# Altium PCB E001-V2.1.PcbDoc (part 1 of 2)
Units mm, origin at the board's own origin, x right, y up, seen from the top; angles counter-clockwise.
Board outline 10.25 x 28.76 mm, 4 copper layers (Top Layer, SIG, GND, Bottom Layer); 47 components, 39 nets, 149 pads, 107 vias.
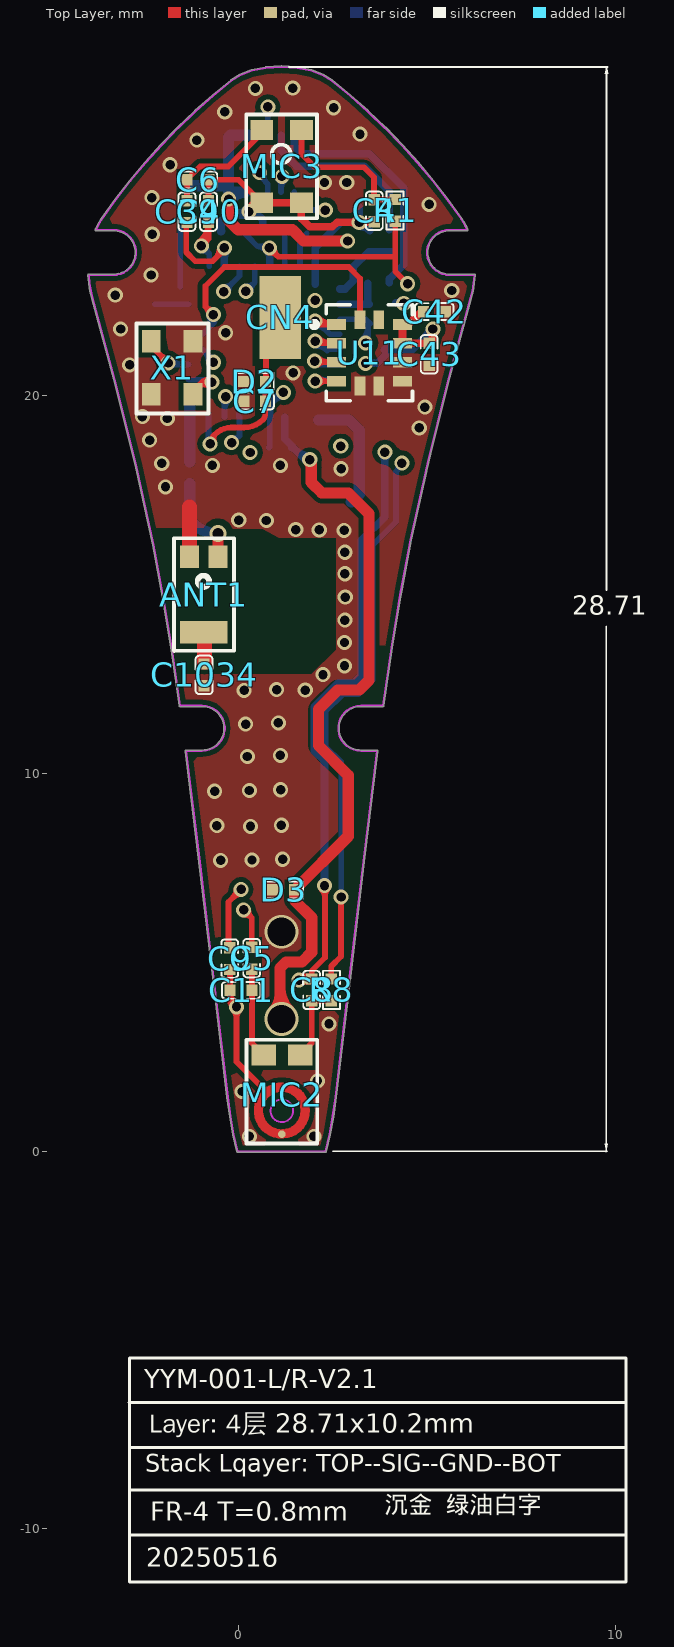
[diagram p0: Top Layer view]
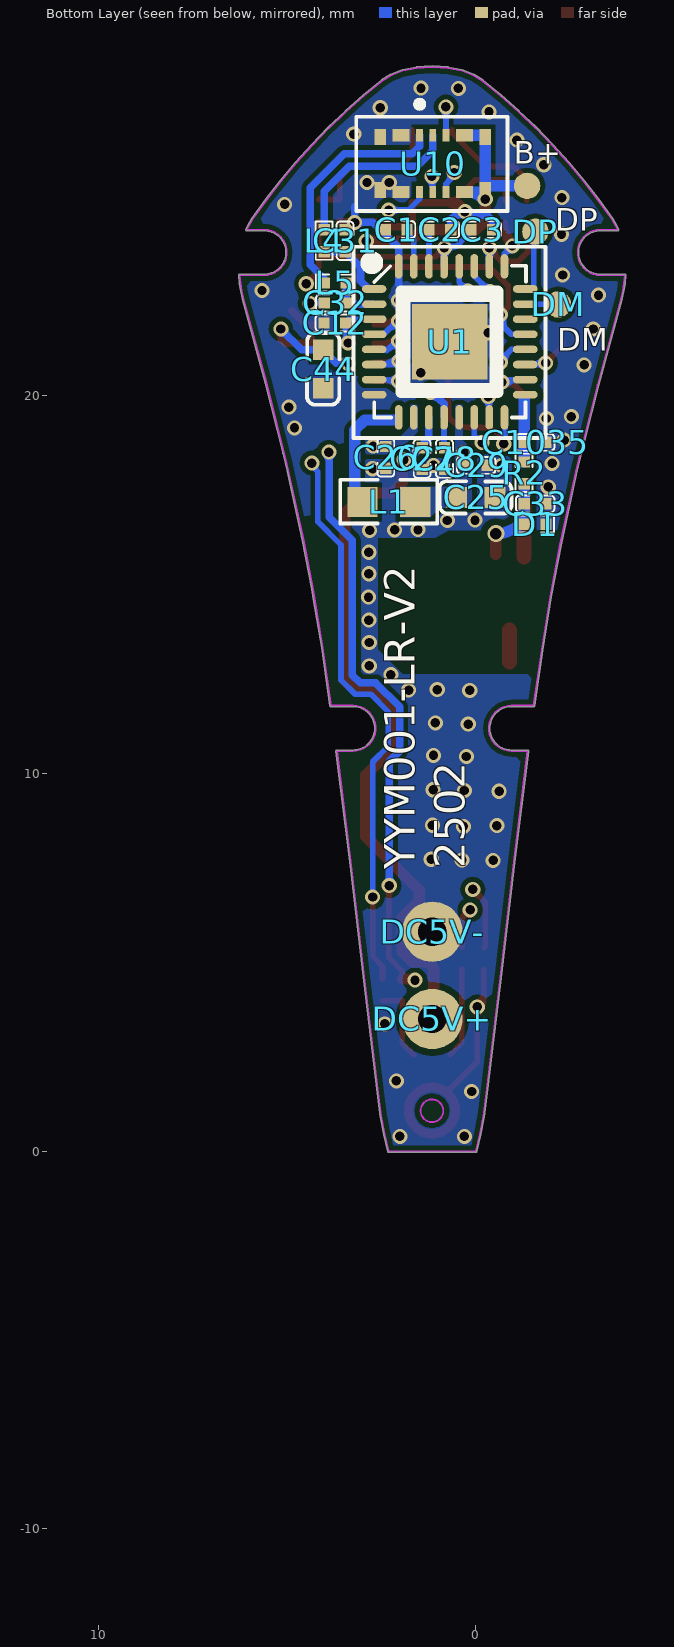
[diagram p1: Bottom Layer view, seen from below]
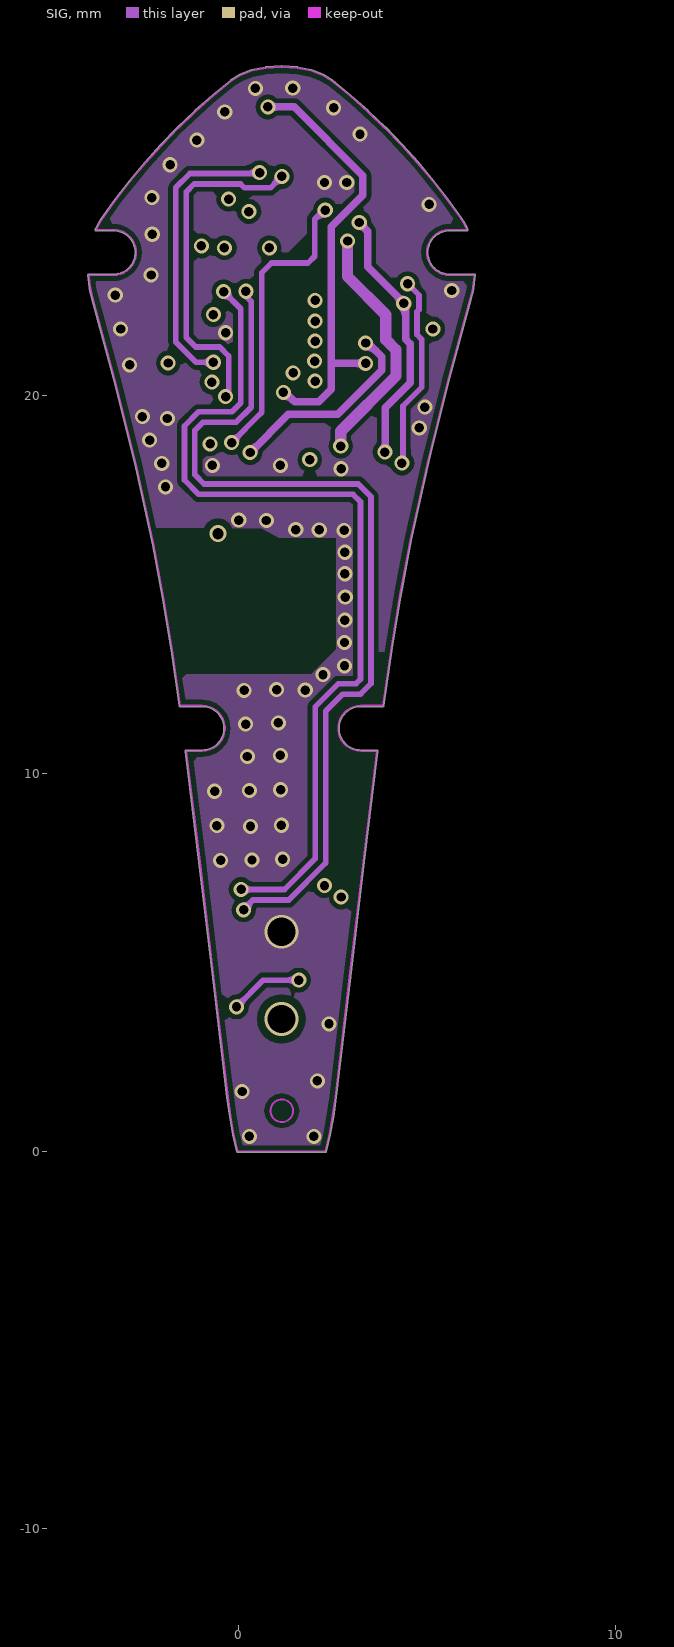
[diagram p2: SIG]
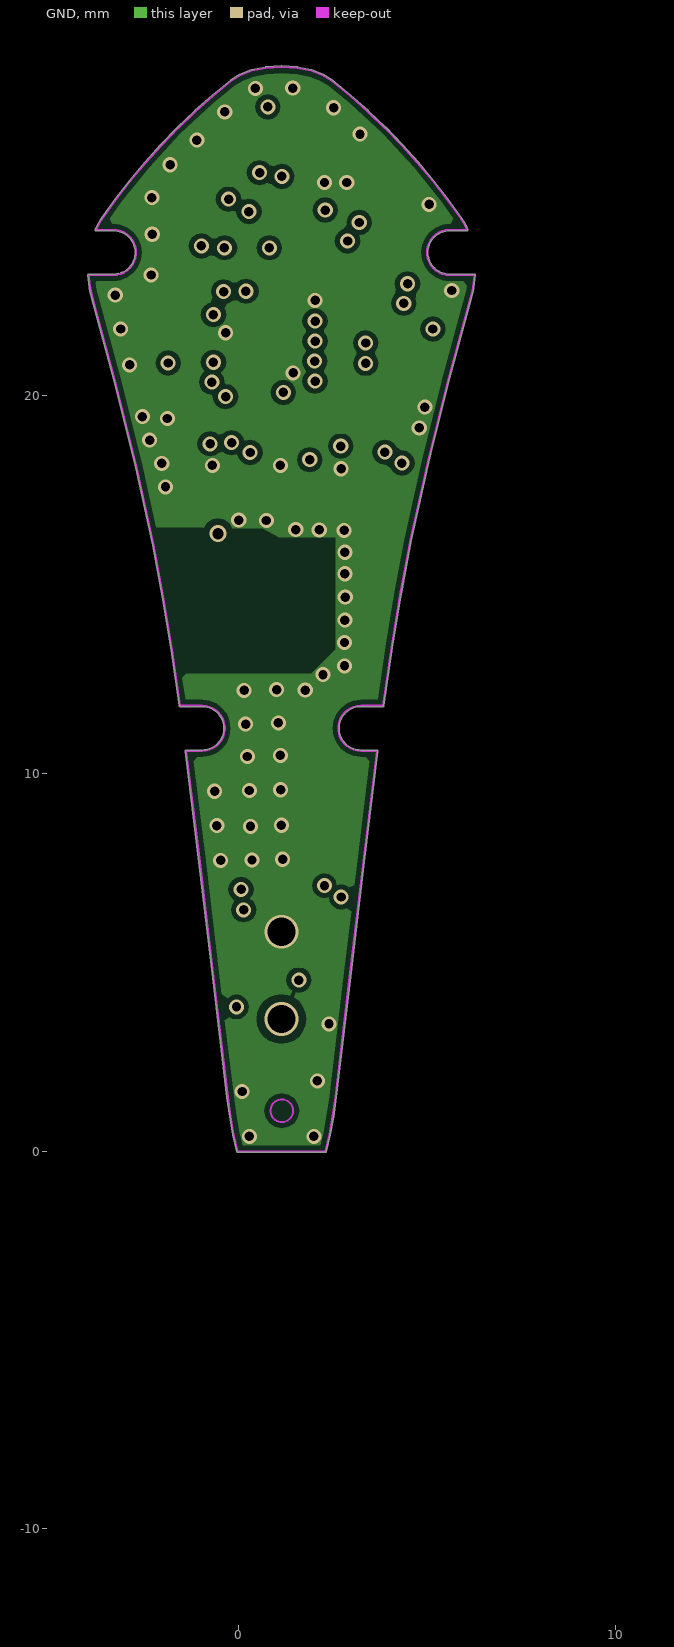
[diagram p3: GND]
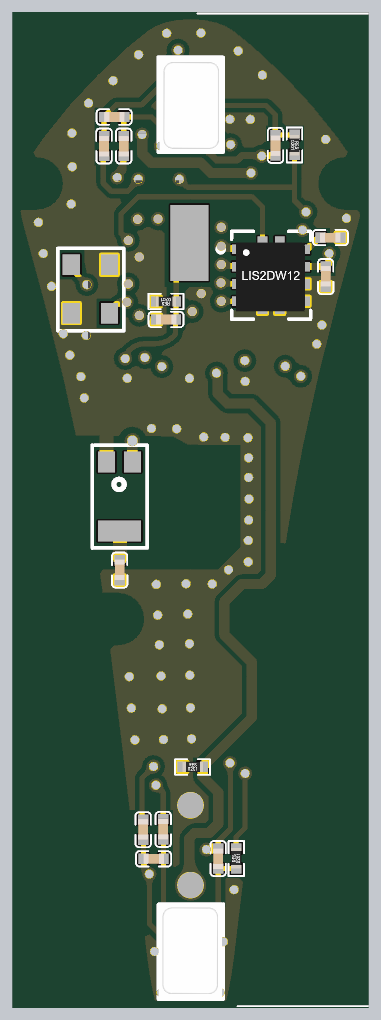
[diagram p5: 3D render of the assembled board from above, using the file's embedded part models]
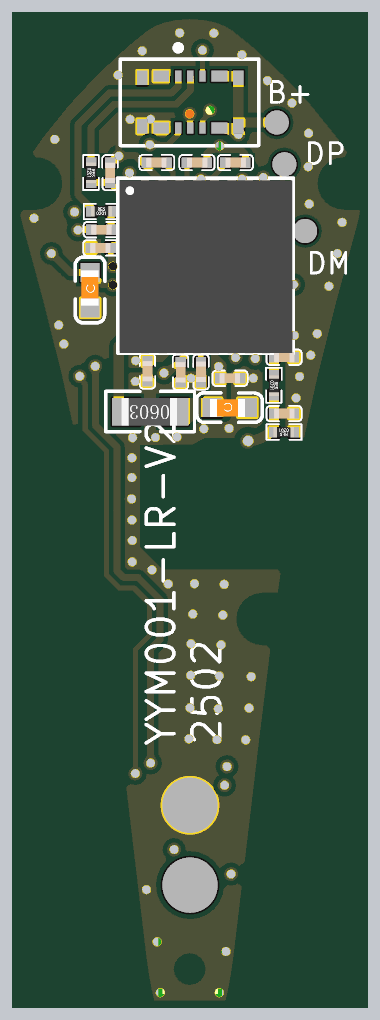
[diagram p6: 3D render of the assembled board from below, using the file's embedded part models]

## Layer stack, top to bottom
Top Layer: signal copper 0.0356
Dielectric: core 0.32, FR-4, Dk 4.8
SIG: signal copper 0.0356
Dielectric: prepreg 0.32, FR-4, Dk 4.8
GND: signal copper 0.0356
Dielectric: core 0.32, FR-4, Dk 4.8
Bottom Layer: signal copper 0.0356

## Board outline
-2.004,14.685 -2.259,16.044 -2.707,18.103 -3.252,20.283 -3.253,20.284 -3.252,20.283 -3.875,22.581 cw(c-3.851,22.587) -3.876,22.582 -3.921,22.771 cw(c-3.896,22.777) -3.921,22.772 cw(c-3.896,22.777) -3.921,22.773 ccw(c-3.896,22.777) -3.921,22.771 -3.921,22.773 cw(c-3.896,22.777) -3.921,22.773 -3.954,22.976 cw(c-3.929,22.981) -3.954,22.977 cw(c-3.929,22.981) -3.954,22.978 -3.974,23.195 cw(c-3.949,23.197) -3.949,23.223 -3.297,23.223 ccw(c-3.297,23.797) -2.723,23.797 ccw(c-3.297,23.797) -3.297,24.372 ccw(c-3.297,23.797) -3.297,24.372 ccw(c-3.297,24.397) -3.297,24.372 -3.758,24.372 cw(c-3.758,24.397) -3.781,24.408 -3.733,24.51 cw(c-3.71,24.5) -3.732,24.512 -3.681,24.606 cw(c-3.658,24.594) -3.681,24.607 cw(c-3.658,24.594) -3.68,24.608 -3.625,24.695 cw(c-3.603,24.681) -3.624,24.695 cw(c10.324,15.084) -0.189,28.366 cw(c-0.173,28.346) -0.187,28.367 0.052,28.514 cw(c0.066,28.493) 0.057,28.517 0.36,28.632 cw(c0.369,28.608) 0.36,28.632 cw(c0.369,28.608) 0.364,28.633 0.727,28.708 0.728,28.708 cw(c0.733,28.683) 0.731,28.709 1.151,28.737 cw(c1.153,28.711) 1.154,28.737 1.574,28.709 cw(c1.572,28.683) 1.578,28.708 1.941,28.633 cw(c1.936,28.608) 1.945,28.632 cw(c1.936,28.608) 1.945,28.632 2.248,28.517 cw(c2.24,28.493) 2.249,28.516 2.249,28.517 cw(c2.24,28.493) 2.253,28.514 2.492,28.367 cw(c2.479,28.346) 2.494,28.366 cw(c-8.019,15.084) 5.929,24.695 cw(c5.908,24.681) 5.93,24.695 5.985,24.608 cw(c5.963,24.594) 5.986,24.607 6.037,24.512 cw(c6.015,24.5) 6.038,24.511 6.038,24.51 6.086,24.408 cw(c6.063,24.397) 6.086,24.408 cw(c6.063,24.397) 6.088,24.397 cw(c6.063,24.397) 6.063,24.372 5.603,24.372 cw(c5.603,24.397) 5.602,24.372 cw(c5.603,23.797) 5.603,24.372 5.602,24.372 ccw(c5.603,23.797) 5.603,23.223 6.254,23.223 cw(c6.254,23.197) 6.28,23.197 cw(c6.254,23.197) 6.28,23.195 6.26,22.978 cw(c6.234,22.981) 6.259,22.977 6.226,22.773 cw(c6.201,22.777) 6.226,22.771 6.181,22.582 cw(c6.156,22.587) 6.181,22.581 5.571,20.334 5.104,18.477 cw(c5.08,18.47) 5.105,18.47 cw(c5.08,18.47) 5.105,18.464 4.995,18.014 cw(c4.97,18.02) 4.993,18.009 4.59,16.177 4.345,14.884 cw(c4.32,14.88) 4.345,14.88 cw(c4.32,14.88) 4.345,14.876 4.298,14.614 4.085,13.326 4.085,13.327 4.085,13.326 3.862,11.794 cw(c3.837,11.797) 3.862,11.793 3.862,11.794 cw(c3.837,11.797) 3.837,11.772 3.253,11.772 ccw(c3.253,11.197) 3.252,10.623 ccw(c3.253,11.197) 3.253,10.623 3.678,10.623 cw(c3.678,10.597) 3.703,10.597 cw(c3.678,10.597) 3.703,10.594 3.342,7.671 2.98,4.615 2.6,1.425 cw(c2.574,1.428) 2.6,1.424 2.529,0.919 cw(c2.504,0.923) 2.529,0.918 2.442,0.441 cw(c2.417,0.445) 2.442,0.439 2.337,-0.009 cw(c2.312,-0.003) 2.312,-0.028 -0.007,-0.028 cw(c-0.007,-0.003) -0.032,-0.009 -0.032,-0.008 -0.137,0.439 cw(c-0.112,0.445) -0.137,0.439 cw(c-0.112,0.445) -0.137,0.44 -0.224,0.918 cw(c-0.199,0.922) -0.224,0.919 -0.294,1.424 cw(c-0.269,1.428) -0.295,1.425 -0.673,4.598 -1.034,7.655 -1.398,10.594 cw(c-1.373,10.597) -1.373,10.623 -0.947,10.623 cw(c-0.947,10.597) -0.947,10.623 ccw(c-0.947,11.197) -0.373,11.197 ccw(c-0.947,11.197) -0.947,11.772 -1.532,11.772 cw(c-1.532,11.797) -1.557,11.794 -1.771,13.272

## Design rules (kind name [scope] priority, off if disabled: settings)
Clearance Clearance_2 [(InNet('NetANT1_2'))] p1: gap=0.18
Clearance Clearance_1 [(InNet('NetC1035_1'))] p2: gap=0.18
Clearance [All] p3: gap=0.127
ComponentClearance [All] p1: gap=0 collisioncheckmode=3 verticalgap=0 showdistances=FALSE
HoleToHoleClearance [All] p1: gap=0 allowstackedmicrovias=TRUE
MinimumSolderMaskSliver [All] p1: minsoldermaskwidth=0
PlaneConnect [All] p1: planeconnectstyle=Direct reliefexpansion=0.508 reliefentries=4 reliefconductorwidth=0.254 reliefairgap=0.254
PolygonConnect [All] p1: connectstyle=Direct reliefconductorwidth=0.254 reliefentries=4 polygonreliefangle="90 Angle"
RoutingVias [All] p1: holewidth=0.2 width=0.4 viastyle="Through Hole" minholewidth=0.2 minwidth=0.4 maxholewidth=1 maxwidth=1.27
SilkToSilkClearance [All] p1: silktosilkclearance=0
SilkscreenOverComponentPads [All] p1: minsilkscreentomaskgap=0
SolderMaskExpansion [All] p1: expansion=0.05
Width [All] p1: maxlimit=1.27 minlimit=0.127 preferedwidth=0.15
22 further rules are at their usual default settings.

## Components (designator, comment, footprint, x,y, rotation, side; value= is the part's Value field where it differs from the comment)
ANT1 "2012F245C07" ANT2012 -0.53,15.74 r270 top
C1 "1uF" C0201 1.82,24.4 r0 bottom
C2 "1uF" C0201 1.24,24.4 r180 bottom
C3 "1uF" C0201 0.13,24.4 r180 bottom
C4 "100nF" C0201 3.61,25.19 r270 top
C5 "1uF" C0201 0.36,4.82 r90 top
C6 "NC" C0201 -1.35,25.72 r0 top
C7 "1pF" C0201 0.15,19.86 r0 top
C8 "100nF" C0201 1.95,4.56 r270 top
C9 "1uF" C0201 -0.22,4.81 r90 top
C11 "NC" C0201 -0.21,4.26 r0 top
C12 "NC" C0201 3.44,21.93 r0 bottom
C25 "10uF" C0402 -0.51,17.31 r0 bottom
C26 "1uF" C0201 2.38,18.66 r270 bottom
C27 "10pF" C0201 1.42,18.63 r270 bottom
C28 "1uF" C0201 0.83,18.05 r90 bottom
C29 "1uF" C0201 -0.3,18.16 r0 bottom
C31 "100pF" C0201 3.46,24.4 r270 bottom
C32 "100pF" C0201 4.01,22.46 r180 bottom
C33 "1.8pF" C0201 -1.28,17.14 r180 bottom
C39 "1uF" c0201 -1.35,25.17 r270 top
C40 "1uF" C0201 -0.78,25.17 r270 top
C42 "100nF" C0201 5.49,22.23 r180 top
C43 "100nF" C0201 5.06,20.81 r90 top
C44 "10uF" C0402 4.04,20.2 r90 bottom
C1034 "2.4pF" C0201 -0.9,12.32 r90 top
C1035 "NC" C0201 -1.28,18.77 r180 bottom
CN4 "X25EX-L2.5*W1.2*H2.5" TP#1 1.12,22.08 r90 top
D1 "NC" R0201 -1.86,16.6 r0 bottom
D2 "NC" R0201 0.73,20.38 r180 top
D3 "ESD0521C" R0201 0.92,6.92 r0 top
DC5V+ "" TP#2 1.15,3.5 r270 bottom
DC5V- "" TP#2 1.15,5.81 r270 bottom
DM "" TP#3 -2.18,22.42 r180 bottom
DP "" TP#3 -1.58,24.35 r180 bottom
L1 "10uH/120mA" R0603 1.6,17.19 r0 bottom
L4 "33nH" R0201 4.01,24.4 r270 bottom
L5 "33nH" R0201 4.01,22.99 r180 bottom
MIC2 "LMA2718B381-AK03" MEMS-2718-B1P3 0.68,2.55 r180 top
MIC3 "LMA2718T381-C3" MEMS-2718 0.63,27.04 r0 top
R1 "1K" R0201 4.16,25.2 r270 top
R2 "1.8pF" R0201 -1.28,18.25 r270 bottom
R8 "1K" R0201 2.47,3.98 r90 top
U1 "JL7016G8" QFN32-AC6956A 2.69,22.83 r180 bottom
U10 "KX035GF-08" KX035GF-08 1.14,26.15 r180 bottom
U11 "LIS2DE12TR" LGA-12_L2.0-W2.0-P0.50-BL 3.48,21.14 r270 top
X1 "24MHz/12pF" 2016_jz -1.71,20.73 r270 top

## Footprints (in the part's own frame and the unit in brackets; to place one, negate y for a bottom-side part, rotate by r counter-clockwise, add the part's x,y. Pads: shape width x height; smd on the part's side, far side on the other; paste and mask are expansions set on the pad)
2016_jz [mm]
  rect 0.6x0.5 smd: 1(-0.715,-0.586) 2(0.685,-0.586) 3(0.685,0.514) 4(-0.715,0.514)
  silkscreen extent -1.19,-0.98 1.2,0.93, body extent -1.14,-0.93 1.15,0.88, height 0.5
ANT2012 [mm]
  rect 0.6x0.5 smd: 1(0,-0.75) 2(0,0)
  rect 0.6x1.25 smd: 3(2,-0.375)
  silkscreen extent -0.49,-1.16 2.49,0.43
C0201 [mm]
  rect 0.3x0.3 smd: 1(0,0) 2(0.58,0)
  silkscreen extent -0.22,-0.23 0.8,0.22, body extent 0,-0.15 0.6,0.15, height 0.15
c0201 [mm]
  rect 0.3x0.3 smd: 1(0,0) 2(0.58,0)
  silkscreen extent -0.22,-0.23 0.8,0.22, body extent 0,-0.15 0.6,0.15, height 0.15
C0402 [mm]
  rect 0.55x0.55 smd: 1(0,0) 2(1.02,0)
  silkscreen extent -0.44,-0.43 1.47,0.43, body extent 0.07,-0.25 1.08,0.26, height 0.87
KX035GF-08 [mm]
  rect 0.18x0.32 smd: 1(-0.35,0.75) 2(0,0.75) 3(0.35,0.75) 5(0.35,-0.75) 6(0,-0.75) 7(-0.35,-0.75)
  rect 0.46x0.32 smd: 4(0.84,-0.75) 4(0.84,0.75) 8(-0.84,-0.75) 8(-0.84,0.75)
  rect 0.3x0.42 smd: 4(1.39,-0.7) 4(1.39,0.7) 8(-1.39,-0.7) 8(-1.39,0.7)
  silkscreen extent -2.02,-1.26 1.98,1.74
LGA-12_L2.0-W2.0-P0.50-BL [mm]
  rect 0.28x0.5 smd: 1(-0.75,-0.875) 2(-0.25,-0.875) 3(0.25,-0.875) 4(0.75,-0.875) 7(0.75,0.875) 8(0.25,0.875) 9(-0.25,0.875) 10(-0.75,0.875)
  rect 0.5x0.28 smd: 5(0.875,-0.25) 6(0.875,0.25) 11(-0.875,0.25) 12(-0.875,-0.25)
  silkscreen extent -1.27,-1.53 1.27,1.14, body extent -0.95,-1.02 1.05,0.98, height 0.7
MEMS-2718 [mm]
  rect 0.6x0.54 smd: 1(1.05,0) 2(1.05,-1.93) 3(0,-1.93) 4(0,0)
  silkscreen extent -0.41,-2.34 1.46,0.41, body extent -0.38,-2.36 1.47,0.39, height 0.9
MEMS-2718-B1P3 [mm] "2718-底进音"
  rect 0.65x0.55 smd: 1(0,0) 2(-0.962,0)
  round 0.2 smd: 3(-0.48,2.1)
  Top Layer circle w0.25: c-0.48,1.475 r0.62
  Keep-Out Layer circle w0.05: c-0.48,1.48 r0.3
  silkscreen extent -1.42,-0.4 0.46,2.35, body extent -1.39,-0.43 0.46,2.32, height 0.9
QFN32-AC6956A [mm]
  rect 2x2 smd: 0(2,-1.4)
  oval 0.65x0.2 smd: 1(0,0) 2(0,-0.4) 3(0,-0.8) 4(0,-1.2) 5(0,-1.6) 6(0,-2) 7(0,-2.4) 8(0,-2.8) 17(4,-2.8) 18(4,-2.4) 19(4,-2) 20(4,-1.6) 21(4,-1.2) 22(4,-0.8) 23(4,-0.4) 24(4,0)
  oval 0.2x0.65 smd: 9(0.65,-3.4) 10(1.05,-3.4) 11(1.45,-3.4) 12(1.85,-3.4) 13(2.25,-3.4) 14(2.65,-3.4) 15(3.05,-3.4) 16(3.45,-3.4) 25(3.45,0.6) 26(3.05,0.6) 27(2.65,0.6) 28(2.25,0.6) 29(1.85,0.6) 30(1.45,0.6) 31(1.05,0.6) 32(0.65,0.6)
  silkscreen extent -0.55,-3.94 4.53,1.12, body extent -0.5,-3.95 4.51,1.06, height 1
R0201 [mm]
  rect 0.3x0.3 smd: 1(0,0) 2(0.58,0)
  silkscreen extent -0.22,-0.23 0.8,0.22, body extent 0,-0.15 0.6,0.15, height 0.15
R0603 [mm]
  rect 0.8x0.8 smd: 1(0,0) 2(1.4,0)
  silkscreen extent -0.58,-0.59 1.99,0.57, body extent -0.08,-0.4 1.53,0.4, height 0.45
TP#1 [mm]
  rect 2.2x1.1 smd: 1(0,0)
TP#2 [mm]
  round 1.6 smd: 1(0,0)
TP#3 [mm]
  round 0.7 smd: 1(0,0)

## Part data
ANT1: library part BTANT1
C1 C2 C3 C26 C28 C29: library part CGA0201X5R105M160ET
C4 C8 C42 C43: library part CGA0201X5R104K100ET
C5 C9 C39 C40: library part FS03B225M6R3PLG
C6 C11: library part GRM033R60J105KEA2D
C7 C31 C32: library part C0201C0G101J250NTA
C12: library part CAP_0603
C25 C44: library part HGC0603R5106M160NTHJ
C27: library part GRM033R61C105ME15D
C33: library part LQP03HQ2N0B02D
C1034 C1035: library part GJM0335C1HR30WB01D
CN4: library part BW0021AG-L3.5W1.5H2.5
D1 D2: library part ESD0521C
DC5V+ DC5V- DM DP: library part Test-Point
L1: library part MCL1608S100MT
L4 L5: library part SDCL0603Q33NHT02B03
MIC2: library part MIC-2718-B1P3底进音_1
MIC3: library part MIC2718_1
R1 R2 R8: library part RC0201FR-070RL
X1: library part TAXM24M4ZDBCCT2T

## Free pads (board coordinates)
  round 0.7 smd far side: 0(-1.36,25.56)

## Via types
v1: diameter 0.4, hole 0.25, Top Layer to Bottom Layer, tented both sides, 104 vias
v2: diameter 0.9, hole 0.75, Top Layer to Bottom Layer, tented both sides, 2 vias
v3: diameter 0.45, hole 0.3, Top Layer to Bottom Layer, tented both sides, 1 vias

## Nets (pads, with @x,y where several pads share a name; then routed paths per layer and width w, separated by ;. In a path a pad name is that pad's centre, name@x,y a point inside that pad or via, vN(x,y) a via of type N, cw(c..) or ccw(c..) an arc to the next point about the centre after c; other vN are vias at no path point)
ACM: C2.1 U1.30 | length 0.9
  Bottom Layer w0.15: C2.1@1.23,24.31 1.24,24.3 U1.30@1.24,23.43
AGND: C1.2 C2.2 C3.2 C4.2 C6.2 C8.1 C9.1 C11.1 C31.1 C32.1 C40.1 MIC2.3 MIC3.2 MIC3.3 U1.32 | length 87.8
  Top Layer w0.15: C40.1@-0.78,25.17 -0.78,25.71 C6.2@-0.77,25.72 0.02,25.72 MIC3.3@0.63,25.11 ; C9.1@-0.22,4.81 -0.21,4.8 C11.1@-0.21,4.26 C11.1@-0.21,4.179 ; v1(-0.04,3.82) -0.21,3.99 C11.1@-0.21,4.179 ; v1(-0.04,3.82) -0.04,2.37 0.69,1.64 0.83,1.64 ; v1(0.29,24.88) v1@0.31,24.88 ; C8.1@1.95,4.56 1.95,4.77 2.304,5.124 v1@2.304,6.986 ; -0.21,3.997 ccw(c-0.005,3.997) v1@-0.045,3.795 ; -0.21,3.997 ccw(c-0.005,3.997) v1@-0.045,3.795 ; -0.21,3.997 ccw(c-0.005,3.997) v1@-0.045,3.795 ; -0.21,3.997 ccw(c-0.005,3.997) v1@-0.045,3.795 ; -0.21,3.997 ccw(c-0.005,3.997) v1@-0.045,3.795 ; -0.21,3.997 ccw(c-0.005,3.997) v1@-0.045,3.795 ; -0.21,3.997 ccw(c-0.005,3.997) v1@-0.045,3.795 ; -0.21,3.997 ccw(c-0.005,3.997) v1@-0.045,3.795 ; -0.21,3.997 ccw(c-0.005,3.997) v1@-0.045,3.795 ; C11.1@-0.21,4.179 ccw(c0.031,4.179) v1@-0.016,3.943 ; C11.1@-0.21,4.179 ccw(c0.031,4.179) v1@-0.016,3.943 ; C11.1@-0.21,4.179 ccw(c0.031,4.179) v1@-0.016,3.943 ; C11.1@-0.21,4.179 ccw(c0.031,4.179) v1@-0.016,3.943 ; C11.1@-0.21,4.179 ccw(c0.031,4.179) v1@-0.016,3.943 ; C11.1@-0.21,4.179 ccw(c0.031,4.179) v1@-0.016,3.943 ; C11.1@-0.21,4.179 ccw(c0.031,4.179) v1@-0.016,3.943 ; C11.1@-0.21,4.179 ccw(c0.031,4.179) v1@-0.016,3.943 ; C11.1@-0.21,4.179 ccw(c0.031,4.179) v1@-0.016,3.943 ; v1@-0.128,3.732 cw(c-0.343,3.517) -0.04,3.517 ; v1@-0.128,3.732 cw(c-0.343,3.517) -0.04,3.517 ; v1@-0.128,3.732 cw(c-0.343,3.517) -0.04,3.517 ; v1@-0.128,3.732 cw(c-0.343,3.517) -0.04,3.517 ; v1@-0.128,3.732 cw(c-0.343,3.517) -0.04,3.517 ; v1@-0.128,3.732 cw(c-0.343,3.517) -0.04,3.517 ; v1@-0.128,3.732 cw(c-0.343,3.517) -0.04,3.517 ; v1@-0.128,3.732 cw(c-0.343,3.517) -0.04,3.517 ; v1@-0.128,3.732 cw(c-0.343,3.517) -0.04,3.517 ; -0.04,3.519 cw(c0.261,3.519) v1@0.048,3.732 ; -0.04,3.519 cw(c0.261,3.519) v1@0.048,3.732 ; -0.04,3.519 cw(c0.261,3.519) v1@0.048,3.732 ; -0.04,3.519 cw(c0.261,3.519) v1@0.048,3.732 ; -0.04,3.519 cw(c0.261,3.519) v1@0.048,3.732 ; -0.04,3.519 cw(c0.261,3.519) v1@0.048,3.732 ; -0.04,3.519 cw(c0.261,3.519) v1@0.048,3.732 ; -0.04,3.519 cw(c0.261,3.519) v1@0.048,3.732 ; -0.04,3.519 cw(c0.261,3.519) v1@0.048,3.732 ; v1@2.202,6.942 cw(c1.954,6.694) 2.304,6.694 ; v1@2.202,6.942 cw(c1.954,6.694) 2.304,6.694 ; v1@2.202,6.942 cw(c1.954,6.694) 2.304,6.694 ; v1@2.202,6.942 cw(c1.954,6.694) 2.304,6.694 ; v1@2.202,6.942 cw(c1.954,6.694) 2.304,6.694 ; v1@2.202,6.942 cw(c1.954,6.694) 2.304,6.694 ; 2.304,6.762 cw(c2.558,6.762) v1@2.378,6.942 ; 2.304,6.762 cw(c2.558,6.762) v1@2.378,6.942 ; 2.304,6.762 cw(c2.558,6.762) v1@2.378,6.942 ; 2.304,6.762 cw(c2.558,6.762) v1@2.378,6.942 ; 2.304,6.762 cw(c2.558,6.762) v1@2.378,6.942 ; 2.304,6.762 cw(c2.558,6.762) v1@2.378,6.942
  Top Layer w0.2: MIC3.3@0.63,25.11 MIC3.2@1.68,25.11 1.68,24.69 1.687,24.69 1.9,24.477 2.501,24.477 2.624,24.6 v1@3.19,24.6 ; v1@3.214,24.61 C4.2@3.61,24.61 ; 2.944,24.6 cw(c2.944,24.324) v1@3.139,24.519 ; 2.944,24.6 cw(c2.944,24.324) v1@3.139,24.519 ; 2.944,24.6 cw(c2.944,24.324) v1@3.139,24.519 ; 2.944,24.6 cw(c2.944,24.324) v1@3.139,24.519 ; 2.944,24.6 cw(c2.944,24.324) v1@3.139,24.519 ; 2.944,24.6 cw(c2.944,24.324) v1@3.139,24.519 ; 2.993,24.6 ccw(c2.993,24.807) v1@3.139,24.661 ; 2.993,24.6 ccw(c2.993,24.807) v1@3.139,24.661 ; 2.993,24.6 ccw(c2.993,24.807) v1@3.139,24.661 ; 2.993,24.6 ccw(c2.993,24.807) v1@3.139,24.661 ; 2.993,24.6 ccw(c2.993,24.807) v1@3.139,24.661 ; 2.993,24.6 ccw(c2.993,24.807) v1@3.139,24.661 ; v1@3.281,24.519 cw(c3.5,24.3) C4.2@3.5,24.61 ; v1@3.281,24.519 cw(c3.5,24.3) C4.2@3.5,24.61 ; v1@3.281,24.519 cw(c3.5,24.3) C4.2@3.5,24.61 ; v1@3.281,24.519 cw(c3.5,24.3) C4.2@3.5,24.61 ; v1@3.281,24.519 cw(c3.5,24.3) C4.2@3.5,24.61 ; v1@3.281,24.519 cw(c3.5,24.3) C4.2@3.5,24.61
  Top Layer w0.3: v1@0.31,24.88 0.54,25.11 MIC3.3@0.63,25.11 ; v1@1.64,4.56 C8.1@1.95,4.56 ; MIC3.3@0.339,24.87 cw(c0.63,24.814) MIC3.3@0.63,25.11 ; MIC3.3@0.339,24.87 cw(c0.63,24.814) MIC3.3@0.63,25.11 ; MIC3.3@0.339,24.87 cw(c0.63,24.814) MIC3.3@0.63,25.11 ; MIC3.3@0.339,24.87 cw(c0.63,24.814) MIC3.3@0.63,25.11 ; MIC3.3@0.339,24.87 cw(c0.63,24.814) MIC3.3@0.63,25.11 ; MIC3.3@0.339,24.87 cw(c0.63,24.814) MIC3.3@0.63,25.11 ; MIC3.3@0.339,24.87 cw(c0.63,24.814) MIC3.3@0.63,25.11 ; MIC3.3@0.339,24.87 cw(c0.63,24.814) MIC3.3@0.63,25.11 ; MIC3.3@0.339,24.87 cw(c0.63,24.814) MIC3.3@0.63,25.11 ; MIC3.3@0.339,24.87 cw(c0.63,24.814) MIC3.3@0.63,25.11
  SIG w0.15: v1(-0.04,3.82) 0.67,4.53 v1(1.61,4.53) ; v1@-0.04,3.945 ccw(c-0.04,4.247) 0.173,4.033 ; v1@-0.04,3.945 ccw(c-0.04,4.247) 0.173,4.033 ; v1@-0.04,3.945 ccw(c-0.04,4.247) 0.173,4.033 ; v1@-0.04,3.945 ccw(c-0.04,4.247) 0.173,4.033 ; v1@-0.04,3.945 ccw(c-0.04,4.247) 0.173,4.033 ; v1@-0.04,3.945 ccw(c-0.04,4.247) 0.173,4.033 ; v1@-0.04,3.945 ccw(c-0.04,4.247) 0.173,4.033 ; v1@-0.04,3.945 ccw(c-0.04,4.247) 0.173,4.033 ; v1@-0.04,3.945 ccw(c-0.04,4.247) 0.173,4.033 ; v1@0.085,3.82 cw(c0.387,3.82) 0.173,4.033 ; v1@0.085,3.82 cw(c0.387,3.82) 0.173,4.033 ; v1@0.085,3.82 cw(c0.387,3.82) 0.173,4.033 ; v1@0.085,3.82 cw(c0.387,3.82) 0.173,4.033 ; v1@0.085,3.82 cw(c0.387,3.82) 0.173,4.033 ; v1@0.085,3.82 cw(c0.387,3.82) 0.173,4.033 ; v1@0.085,3.82 cw(c0.387,3.82) 0.173,4.033 ; v1@0.085,3.82 cw(c0.387,3.82) 0.173,4.033 ; v1@0.085,3.82 cw(c0.387,3.82) 0.173,4.033 ; 1.308,4.53 cw(c1.308,4.228) v1@1.522,4.442 ; 1.308,4.53 ccw(c1.308,4.832) v1@1.522,4.618 ; 1.308,4.53 cw(c1.308,4.228) v1@1.522,4.442 ; 1.308,4.53 ccw(c1.308,4.832) v1@1.522,4.618 ; 1.308,4.53 cw(c1.308,4.228) v1@1.522,4.442 ; 1.308,4.53 ccw(c1.308,4.832) v1@1.522,4.618 ; 1.308,4.53 cw(c1.308,4.228) v1@1.522,4.442 ; 1.308,4.53 ccw(c1.308,4.832) v1@1.522,4.618 ; 1.308,4.53 ccw(c1.308,4.832) v1@1.522,4.618 ; 1.308,4.53 cw(c1.308,4.228) v1@1.522,4.442 ; 1.308,4.53 ccw(c1.308,4.832) v1@1.522,4.618 ; 1.308,4.53 cw(c1.308,4.228) v1@1.522,4.442 ; 1.308,4.53 ccw(c1.308,4.832) v1@1.522,4.618 ; 1.308,4.53 cw(c1.308,4.228) v1@1.522,4.442 ; 1.308,4.53 ccw(c1.308,4.832) v1@1.522,4.618 ; 1.308,4.53 cw(c1.308,4.228) v1@1.522,4.442 ; 1.308,4.53 ccw(c1.308,4.832) v1@1.522,4.618 ; 1.308,4.53 cw(c1.308,4.228) v1@1.522,4.442
  SIG w0.2: v1@3.19,24.6 3.435,24.355 3.435,23.417 4.436,22.416 4.436,21.498 4.561,21.373 4.561,20.351 3.9,19.69 v1@3.9,18.51 ; v1@3.21,24.49 cw(c3.21,24.273) 3.364,24.426 ; v1@3.21,24.49 cw(c3.21,24.273) 3.364,24.426 ; v1@3.21,24.49 cw(c3.21,24.273) 3.364,24.426 ; v1@3.21,24.49 cw(c3.21,24.273) 3.364,24.426 ; v1@3.21,24.49 cw(c3.21,24.273) 3.364,24.426 ; v1@3.21,24.49 cw(c3.21,24.273) 3.364,24.426 ; v1@3.31,24.59 ccw(c3.576,24.59) 3.388,24.402 ; v1@3.31,24.59 ccw(c3.576,24.59) 3.388,24.402 ; v1@3.31,24.59 ccw(c3.576,24.59) 3.388,24.402 ; v1@3.31,24.59 ccw(c3.576,24.59) 3.388,24.402 ; v1@3.31,24.59 ccw(c3.576,24.59) 3.388,24.402 ; v1@3.31,24.59 ccw(c3.576,24.59) 3.388,24.402 ; v1@3.819,18.581 ccw(c3.624,18.776) 3.9,18.776 ; v1@3.819,18.581 ccw(c3.624,18.776) 3.9,18.776 ; v1@3.819,18.581 ccw(c3.624,18.776) 3.9,18.776 ; v1@3.819,18.581 ccw(c3.624,18.776) 3.9,18.776 ; v1@3.819,18.581 ccw(c3.624,18.776) 3.9,18.776 ; v1@3.819,18.581 ccw(c3.624,18.776) 3.9,18.776 ; 3.9,18.727 ccw(c4.107,18.727) v1@3.961,18.581 ; 3.9,18.727 ccw(c4.107,18.727) v1@3.961,18.581 ; 3.9,18.727 ccw(c4.107,18.727) v1@3.961,18.581 ; 3.9,18.727 ccw(c4.107,18.727) v1@3.961,18.581 ; 3.9,18.727 ccw(c4.107,18.727) v1@3.961,18.581 ; 3.9,18.727 ccw(c4.107,18.727) v1@3.961,18.581 ; 4.211,22.641 cw(c4.02,22.45) v1@4.29,22.45 ; 4.211,22.641 cw(c4.02,22.45) v1@4.29,22.45 ; 4.211,22.641 cw(c4.02,22.45) v1@4.29,22.45 ; 4.211,22.641 cw(c4.02,22.45) v1@4.29,22.45 ; 4.211,22.641 cw(c4.02,22.45) v1@4.29,22.45 ; 4.211,22.641 cw(c4.02,22.45) v1@4.29,22.45 ; 4.24,22.612 ccw(c4.39,22.762) v1@4.39,22.55 ; 4.24,22.612 ccw(c4.39,22.762) v1@4.39,22.55 ; 4.24,22.612 ccw(c4.39,22.762) v1@4.39,22.55 ; 4.24,22.612 ccw(c4.39,22.762) v1@4.39,22.55 ; 4.24,22.612 ccw(c4.39,22.762) v1@4.39,22.55 ; 4.24,22.612 ccw(c4.39,22.762) v1@4.39,22.55 ; v1@4.319,22.379 cw(c4.038,22.098) 4.436,22.098 ; v1@4.319,22.379 cw(c4.038,22.098) 4.436,22.098 ; v1@4.319,22.379 cw(c4.038,22.098) 4.436,22.098 ; v1@4.319,22.379 cw(c4.038,22.098) 4.436,22.098 ; v1@4.319,22.379 cw(c4.038,22.098) 4.436,22.098 ; v1@4.319,22.379 cw(c4.038,22.098) 4.436,22.098
  Bottom Layer w0.2: C3.2@-0.45,24.351 C3.2@-0.436,24.366 ; C3.2@-0.45,24.38 C3.2@-0.45,24.4 ; C3.2@-0.45,24.441 C3.2@-0.45,24.4 ; v1@0.29,24.777 -0.303,24.777 -0.45,24.63 C3.2@-0.45,24.4 ; v1@0.315,24.783 cw(c0.399,24.463) 0.633,24.697 ; C2.2@0.66,24.4 0.66,24.67 ; U1.32@2.04,23.43 2.04,23.916 2.724,24.6 v1@3.21,24.6 ; v1(2.29,7.03) 2.29,10.323 2.018,10.595 2.018,11.765 2.643,12.39 ; 2.65,12.4 3.065,12.4 3.267,12.602 3.267,16.177 3.88,16.79 v1@3.88,18.35 ; v1(3.21,24.59) v1@3.21,24.6 ; C31.1@3.46,24.4 3.26,24.6 v1@3.21,24.6 ; 4.173,22.46 ccw(c4.173,22.667) v1@4.319,22.521 ; -0.2,24.777 ccw(c-0.2,25.37) v1@0.219,24.951 ; -0.2,24.777 ccw(c-0.2,25.37) v1@0.219,24.951 ; -0.2,24.777 ccw(c-0.2,25.37) v1@0.219,24.951 ; -0.2,24.777 ccw(c-0.2,25.37) v1@0.219,24.951 ; -0.2,24.777 ccw(c-0.2,25.37) v1@0.219,24.951 ; -0.2,24.777 ccw(c-0.2,25.37) v1@0.219,24.951 ; -0.2,24.777 ccw(c-0.2,25.37) v1@0.219,24.951 ; v1@2.219,7.101 ccw(c2.049,7.271) 2.29,7.271 ; v1@2.219,7.101 ccw(c2.049,7.271) 2.29,7.271 ; v1@2.219,7.101 ccw(c2.049,7.271) 2.29,7.271 ; v1@2.219,7.101 ccw(c2.049,7.271) 2.29,7.271 ; v1@2.219,7.101 ccw(c2.049,7.271) 2.29,7.271 ; v1@2.219,7.101 ccw(c2.049,7.271) 2.29,7.271 ; 2.29,7.271 ccw(c2.531,7.271) v1@2.361,7.101 ; 2.29,7.271 ccw(c2.531,7.271) v1@2.361,7.101 ; 2.29,7.271 ccw(c2.531,7.271) v1@2.361,7.101 ; 2.29,7.271 ccw(c2.531,7.271) v1@2.361,7.101 ; 2.29,7.271 ccw(c2.531,7.271) v1@2.361,7.101 ; 2.29,7.271 ccw(c2.531,7.271) v1@2.361,7.101 ; 2.944,24.6 cw(c2.944,24.324) v1@3.139,24.519 ; 2.944,24.6 cw(c2.944,24.324) v1@3.139,24.519 ; 2.944,24.6 cw(c2.944,24.324) v1@3.139,24.519 ; 2.944,24.6 cw(c2.944,24.324) v1@3.139,24.519 ; 2.944,24.6 cw(c2.944,24.324) v1@3.139,24.519 ; 2.944,24.6 cw(c2.944,24.324) v1@3.139,24.519 ; 2.993,24.6 ccw(c2.993,24.807) v1@3.139,24.661 ; 2.993,24.6 ccw(c2.993,24.807) v1@3.139,24.661 ; 2.993,24.6 ccw(c2.993,24.807) v1@3.139,24.661 ; 2.993,24.6 ccw(c2.993,24.807) v1@3.139,24.661 ; 2.993,24.6 ccw(c2.993,24.807) v1@3.139,24.661 ; 2.993,24.6 ccw(c2.993,24.807) v1@3.139,24.661 ; v1@3.21,24.49 cw(c3.21,24.104) C31.1@3.483,24.377 ; v1@3.21,24.49 cw(c3.21,24.104) C31.1@3.483,24.377 ; v1@3.21,24.49 cw(c3.21,24.104) C31.1@3.483,24.377 ; v1@3.21,24.49 cw(c3.21,24.104) C31.1@3.483,24.377 ; v1@3.21,24.49 cw(c3.21,24.104) C31.1@3.483,24.377 ; v1@3.21,24.49 cw(c3.21,24.104) C31.1@3.483,24.377 ; v1@3.819,18.439 cw(c3.673,18.293) 3.88,18.293 ; v1@3.819,18.439 cw(c3.673,18.293) 3.88,18.293 ; v1@3.819,18.439 cw(c3.673,18.293) 3.88,18.293 ; v1@3.819,18.439 cw(c3.673,18.293) 3.88,18.293 ; v1@3.819,18.439 cw(c3.673,18.293) 3.88,18.293 ; v1@3.819,18.439 cw(c3.673,18.293) 3.88,18.293 ; 3.88,18.244 cw(c4.156,18.244) v1@3.961,18.439 ; 3.88,18.244 cw(c4.156,18.244) v1@3.961,18.439 ; 3.88,18.244 cw(c4.156,18.244) v1@3.961,18.439 ; 3.88,18.244 cw(c4.156,18.244) v1@3.961,18.439 ; 3.88,18.244 cw(c4.156,18.244) v1@3.961,18.439 ; 3.88,18.244 cw(c4.156,18.244) v1@3.961,18.439
  other v1: 3.89,18.51 4.39,22.45
BOAT_PL: U1.14 U10.7 | length 11
  SIG w0.15: v1(-0.17,18.76) 0.6,19.53 ; v1@-0.17,18.885 ccw(c-0.17,19.187) 0.043,18.973 ccw(c0.257,18.76) v1@-0.045,18.76 ; 0.626,19.558 0.626,23.256 0.888,23.518 1.85,23.518 2.03,23.698 2.03,24.68 v1@2.27,24.92 ; 2.028,24.678 cw(c2.31,24.397) v1@2.31,24.795 ; 2.125,24.775 ccw(c1.98,24.92) v1@2.185,24.92
  Bottom Layer w0.15: v1@-0.146,18.883 ccw(c-0.107,19.087) 0.04,18.94 U1.14@0.04,19.43 ; U1.14@0.02,19.43 U1.14@0.02,19.53 ; U10.7@1.49,25.4 1.49,25.214 1.784,24.92 v1(2.31,24.92) ; v1@2.222,24.832 ccw(c2.008,24.618) 2.008,24.92 ccw(c2.008,25.222) v1@2.222,25.008
DACN-: C31.2 L4.2 U1.1 | length 2
  Bottom Layer w0.2: U1.1@2.69,22.83 2.84,22.83 3.053,23.043 3.053,23.413 C31.2@3.46,23.82 L4.2@4.01,23.82 L4.2@4.06,23.82
DACP+: C32.2 L5.2 U1.2 | length 1.3
  Bottom Layer w0.2: U1.2@2.69,22.43 C32.2@3.48,22.43 ; C32.2@3.43,22.46 L5.2@3.43,22.98
DC5V: C27.1 D3.2 DC5V+.1 U1.11 | length 26.4
  Top Layer w0.3: v2@0.938,3.712 ccw(c0.515,4.135) 1.113,4.135 ; v2@1.113,3.537 1.113,4.851 1.27,5.008 1.69,5.008 1.952,5.27 1.952,6.188 1.5,6.64 D3.2@1.5,6.92 2.92,8.34 2.92,9.95 2.13,10.74 2.13,11.7 2.64,12.21 3.21,12.21 3.47,12.47 3.47,16.88 2.92,17.43 2.71,17.43 2.22,17.43 1.94,17.71 1.94,18.27 v1(1.9,18.31) ; 1.113,4.314 ccw(c1.964,4.314) v2@1.362,3.712 ; v1@1.865,18.275 cw(c1.683,18.093) 1.94,18.093 ; v1@1.865,18.275 cw(c1.683,18.093) 1.94,18.093 ; v1@1.865,18.275 cw(c1.683,18.093) 1.94,18.093 ; v1@1.865,18.275 cw(c1.683,18.093) 1.94,18.093 ; v1@1.865,18.275 cw(c1.683,18.093) 1.94,18.093 ; v1@1.865,18.275 cw(c1.683,18.093) 1.94,18.093 ; v1@1.865,18.275 cw(c1.683,18.093) 1.94,18.093 ; v1@1.865,18.275 cw(c1.683,18.093) 1.94,18.093
  Bottom Layer w0.2: U1.11@1.24,19.43 1.24,18.86 C27.1@1.44,18.66 ; C27.1@1.42,18.63 1.461,18.63 1.781,18.31 v1(1.9,18.31) ; C27.1@1.526,18.565 ccw(c1.9,18.939) v1@1.9,18.41 ; C27.1@1.526,18.565 ccw(c1.9,18.939) v1@1.9,18.41 ; C27.1@1.526,18.565 ccw(c1.9,18.939) v1@1.9,18.41 ; C27.1@1.526,18.565 ccw(c1.9,18.939) v1@1.9,18.41 ; C27.1@1.526,18.565 ccw(c1.9,18.939) v1@1.9,18.41 ; C27.1@1.526,18.565 ccw(c1.9,18.939) v1@1.9,18.41 ; C27.1@1.526,18.565 ccw(c1.9,18.939) v1@1.9,18.41 ; C27.1@1.526,18.565 ccw(c1.9,18.939) v1@1.9,18.41 ; C27.1@1.526,18.565 ccw(c1.9,18.939) v1@1.9,18.41
  other v2: 1.15,3.5
DCVDD: C12.1 C25.2 C29.2 L1.1 U1.3 U1.13 | length 14.5
  SIG w0.2: v1(0.32,18.5) 1.333,19.513 2.637,19.513 3.807,20.683 3.807,21.037 v1@3.444,21.4 ; v1@0.32,18.6 ccw(c0.32,18.841) 0.491,18.671 ; v1@0.32,18.6 ccw(c0.32,18.841) 0.491,18.671 ; v1@0.32,18.6 ccw(c0.32,18.841) 0.491,18.671 ; v1@0.32,18.6 ccw(c0.32,18.841) 0.491,18.671 ; v1@0.32,18.6 ccw(c0.32,18.841) 0.491,18.671 ; v1@0.32,18.6 ccw(c0.32,18.841) 0.491,18.671 ; v1@0.32,18.6 ccw(c0.32,18.841) 0.491,18.671 ; v1@0.42,18.5 cw(c0.661,18.5) 0.491,18.671 ; v1@0.42,18.5 cw(c0.661,18.5) 0.491,18.671 ; v1@0.42,18.5 cw(c0.661,18.5) 0.491,18.671 ; v1@0.42,18.5 cw(c0.661,18.5) 0.491,18.671 ; v1@0.42,18.5 cw(c0.661,18.5) 0.491,18.671 ; v1@0.42,18.5 cw(c0.661,18.5) 0.491,18.671 ; v1@0.42,18.5 cw(c0.661,18.5) 0.491,18.671 ; v1@3.38,21.3 cw(c3.38,20.904) 3.66,21.184 ; v1@3.38,21.3 cw(c3.38,20.904) 3.66,21.184 ; v1@3.38,21.3 cw(c3.38,20.904) 3.66,21.184 ; v1@3.38,21.3 cw(c3.38,20.904) 3.66,21.184 ; v1@3.38,21.3 cw(c3.38,20.904) 3.66,21.184 ; v1@3.38,21.3 cw(c3.38,20.904) 3.66,21.184 ; v1@3.38,21.3 cw(c3.38,20.904) 3.66,21.184
  Bottom Layer w0.15: U1.3@2.69,22.03 3.38,22.03 C12.1@3.5,21.91 ; v1(3.38,21.4) 3.45,21.47 C12.1@3.45,21.93 ; v1@3.292,21.488 ccw(c2.909,21.871) C12.1@3.45,21.871 ; v1@3.292,21.488 ccw(c2.909,21.871) C12.1@3.45,21.871 ; v1@3.292,21.488 ccw(c2.909,21.871) C12.1@3.45,21.871 ; v1@3.292,21.488 ccw(c2.909,21.871) C12.1@3.45,21.871 ; v1@3.292,21.488 ccw(c2.909,21.871) C12.1@3.45,21.871 ; v1@3.292,21.488 ccw(c2.909,21.871) C12.1@3.45,21.871 ; v1@3.292,21.488 ccw(c2.909,21.871) C12.1@3.45,21.871
EAR_DET_IO0: U1.15 U10.6 | length 22.8
  SIG w0.15: v1(-0.33,19.98) -0.248,20.062 -0.248,21.056 -0.483,21.292 -1.12,21.292 -1.372,21.544 -1.372,25.401 -1.161,25.612 -0.11,25.612 0.07,25.612 0.174,25.508 0.858,25.508 v1(1.16,25.81) ; 0.947,25.597 cw(c1.16,25.383) v1@1.16,25.685 ; 0.947,25.597 ccw(c0.733,25.81) v1@1.035,25.81 ; 0.947,25.597 cw(c1.16,25.383) v1@1.16,25.685 ; 0.947,25.597 ccw(c0.733,25.81) v1@1.035,25.81 ; 0.947,25.597 cw(c1.16,25.383) v1@1.16,25.685 ; 0.947,25.597 ccw(c0.733,25.81) v1@1.035,25.81 ; 0.947,25.597 cw(c1.16,25.383) v1@1.16,25.685 ; 0.947,25.597 ccw(c0.733,25.81) v1@1.035,25.81 ; 0.947,25.597 ccw(c0.733,25.81) v1@1.035,25.81 ; 0.947,25.597 cw(c1.16,25.383) v1@1.16,25.685 ; 0.947,25.597 ccw(c0.733,25.81) v1@1.035,25.81 ; 0.947,25.597 cw(c1.16,25.383) v1@1.16,25.685 ; 0.947,25.597 ccw(c0.733,25.81) v1@1.035,25.81 ; 0.947,25.597 cw(c1.16,25.383) v1@1.16,25.685 ; 0.947,25.597 ccw(c0.733,25.81) v1@1.035,25.81 ; 0.947,25.597 cw(c1.16,25.383) v1@1.16,25.685 ; 0.947,25.597 ccw(c0.733,25.81) v1@1.035,25.81 ; 0.947,25.597 cw(c1.16,25.383) v1@1.16,25.685
  Bottom Layer w0.15: v1@-0.38,19.98 -0.36,19.96 U1.15@-0.36,19.43 ; U10.6@1.14,25.4 1.14,25.72 v1@1.198,25.662 ; v1@-0.418,19.892 cw(c-0.559,19.751) U1.15@-0.36,19.751 ; v1@-0.418,19.892 cw(c-0.559,19.751) U1.15@-0.36,19.751 ; v1@-0.418,19.892 cw(c-0.559,19.751) U1.15@-0.36,19.751 ; v1@-0.418,19.892 cw(c-0.559,19.751) U1.15@-0.36,19.751 ; v1@-0.418,19.892 cw(c-0.559,19.751) U1.15@-0.36,19.751 ; v1@-0.418,19.892 cw(c-0.559,19.751) U1.15@-0.36,19.751 ; v1@-0.418,19.892 cw(c-0.559,19.751) U1.15@-0.36,19.751 ; v1@-0.418,19.892 cw(c-0.559,19.751) U1.15@-0.36,19.751 ; v1@-0.418,19.892 cw(c-0.559,19.751) U1.15@-0.36,19.751 ; U1.15@-0.36,19.606 cw(c0.044,19.606) v1@-0.242,19.892 ; U1.15@-0.36,19.606 cw(c0.044,19.606) v1@-0.242,19.892 ; U1.15@-0.36,19.606 cw(c0.044,19.606) v1@-0.242,19.892 ; U1.15@-0.36,19.606 cw(c0.044,19.606) v1@-0.242,19.892 ; U1.15@-0.36,19.606 cw(c0.044,19.606) v1@-0.242,19.892 ; U1.15@-0.36,19.606 cw(c0.044,19.606) v1@-0.242,19.892 ; U1.15@-0.36,19.606 cw(c0.044,19.606) v1@-0.242,19.892 ; U1.15@-0.36,19.606 cw(c0.044,19.606) v1@-0.242,19.892 ; U1.15@-0.36,19.606 cw(c0.044,19.606) v1@-0.242,19.892 ; v1@1.072,25.722 cw(c0.907,25.557) U10.6@1.14,25.557 ; v1@1.072,25.722 cw(c0.907,25.557) U10.6@1.14,25.557 ; v1@1.072,25.722 cw(c0.907,25.557) U10.6@1.14,25.557 ; v1@1.072,25.722 cw(c0.907,25.557) U10.6@1.14,25.557 ; v1@1.072,25.722 cw(c0.907,25.557) U10.6@1.14,25.557 ; v1@1.072,25.722 cw(c0.907,25.557) U10.6@1.14,25.557 ; v1@1.072,25.722 cw(c0.907,25.557) U10.6@1.14,25.557 ; v1@1.072,25.722 cw(c0.907,25.557) U10.6@1.14,25.557 ; v1@1.072,25.722 cw(c0.907,25.557) U10.6@1.14,25.557 ; U10.6@1.14,25.46 cw(c1.51,25.46) v1@1.248,25.722 ; U10.6@1.14,25.46 cw(c1.51,25.46) v1@1.248,25.722 ; U10.6@1.14,25.46 cw(c1.51,25.46) v1@1.248,25.722 ; U10.6@1.14,25.46 cw(c1.51,25.46) v1@1.248,25.722 ; U10.6@1.14,25.46 cw(c1.51,25.46) v1@1.248,25.722 ; U10.6@1.14,25.46 cw(c1.51,25.46) v1@1.248,25.722 ; U10.6@1.14,25.46 cw(c1.51,25.46) v1@1.248,25.722 ; U10.6@1.14,25.46 cw(c1.51,25.46) v1@1.248,25.722 ; U10.6@1.14,25.46 cw(c1.51,25.46) v1@1.248,25.722
EAR_DET_IO1: U1.20 U10.5 | length 24.2
  Top Layer w0.15: v1@0.61,25.98 v1@0.62,25.98
  SIG w0.15: v1(-0.65,20.89) -1.11,20.89 -1.649,21.429 -1.649,25.516 -1.276,25.889 0.549,25.889 v1(0.57,25.91) ; -0.952,20.89 cw(c-0.952,20.588) v1@-0.738,20.802 ; -0.952,20.89 ccw(c-0.952,21.192) v1@-0.738,20.978 ; -0.952,20.89 cw(c-0.952,20.588) v1@-0.738,20.802 ; -0.952,20.89 ccw(c-0.952,21.192) v1@-0.738,20.978 ; -0.952,20.89 cw(c-0.952,20.588) v1@-0.738,20.802 ; -0.952,20.89 ccw(c-0.952,21.192) v1@-0.738,20.978 ; -0.952,20.89 cw(c-0.952,20.588) v1@-0.738,20.802 ; -0.952,20.89 ccw(c-0.952,21.192) v1@-0.738,20.978 ; -0.952,20.89 ccw(c-0.952,21.192) v1@-0.738,20.978 ; -0.952,20.89 cw(c-0.952,20.588) v1@-0.738,20.802 ; -0.952,20.89 ccw(c-0.952,21.192) v1@-0.738,20.978 ; -0.952,20.89 cw(c-0.952,20.588) v1@-0.738,20.802 ; -0.952,20.89 ccw(c-0.952,21.192) v1@-0.738,20.978 ; -0.952,20.89 cw(c-0.952,20.588) v1@-0.738,20.802 ; -0.952,20.89 ccw(c-0.952,21.192) v1@-0.738,20.978 ; -0.952,20.89 cw(c-0.952,20.588) v1@-0.738,20.802 ; -0.952,20.89 ccw(c-0.952,21.192) v1@-0.738,20.978 ; -0.952,20.89 cw(c-0.952,20.588) v1@-0.738,20.802 ; 0.217,25.889 ccw(c0.217,26.263) v1@0.482,25.998 ; 0.217,25.889 ccw(c0.217,26.263) v1@0.482,25.998 ; 0.217,25.889 ccw(c0.217,26.263) v1@0.482,25.998 ; 0.217,25.889 ccw(c0.217,26.263) v1@0.482,25.998 ; 0.217,25.889 ccw(c0.217,26.263) v1@0.482,25.998 ; 0.217,25.889 ccw(c0.217,26.263) v1@0.482,25.998 ; 0.217,25.889 ccw(c0.217,26.263) v1@0.482,25.998 ; 0.217,25.889 ccw(c0.217,26.263) v1@0.482,25.998 ; 0.217,25.889 ccw(c0.217,26.263) v1@0.482,25.998 ; 0.319,25.889 cw(c0.319,25.659) v1@0.482,25.822 ; 0.319,25.889 cw(c0.319,25.659) v1@0.482,25.822 ; 0.319,25.889 cw(c0.319,25.659) v1@0.482,25.822 ; 0.319,25.889 cw(c0.319,25.659) v1@0.482,25.822 ; 0.319,25.889 cw(c0.319,25.659) v1@0.482,25.822 ; 0.319,25.889 cw(c0.319,25.659) v1@0.482,25.822 ; 0.319,25.889 cw(c0.319,25.659) v1@0.482,25.822 ; 0.319,25.889 cw(c0.319,25.659) v1@0.482,25.822 ; 0.319,25.889 cw(c0.319,25.659) v1@0.482,25.822
  Bottom Layer w0.15: U1.20@-1.31,21.23 -0.94,21.23 -0.65,20.94 v1(-0.65,20.89) ; v1@0.61,25.98 0.61,25.791 0.79,25.611 U10.5@0.79,25.4 ; -0.899,21.189 cw(c-1.198,20.89) v1@-0.775,20.89 ; -0.899,21.189 cw(c-1.198,20.89) v1@-0.775,20.89 ; -0.899,21.189 cw(c-1.198,20.89) v1@-0.775,20.89 ; -0.899,21.189 cw(c-1.198,20.89) v1@-0.775,20.89 ; -0.899,21.189 cw(c-1.198,20.89) v1@-0.775,20.89 ; -0.899,21.189 cw(c-1.198,20.89) v1@-0.775,20.89 ; -0.899,21.189 cw(c-1.198,20.89) v1@-0.775,20.89 ; -0.899,21.189 cw(c-1.198,20.89) v1@-0.775,20.89 ; -0.899,21.189 cw(c-1.198,20.89) v1@-0.775,20.89 ; -0.778,21.068 ccw(c-0.65,21.196) v1@-0.65,21.015 ; -0.778,21.068 ccw(c-0.65,21.196) v1@-0.65,21.015 ; -0.778,21.068 ccw(c-0.65,21.196) v1@-0.65,21.015 ; -0.778,21.068 ccw(c-0.65,21.196) v1@-0.65,21.015 ; -0.778,21.068 ccw(c-0.65,21.196) v1@-0.65,21.015 ; -0.778,21.068 ccw(c-0.65,21.196) v1@-0.65,21.015 ; -0.778,21.068 ccw(c-0.65,21.196) v1@-0.65,21.015 ; -0.778,21.068 ccw(c-0.65,21.196) v1@-0.65,21.015 ; -0.778,21.068 ccw(c-0.65,21.196) v1@-0.65,21.015 ; v1@0.691,25.877 ccw(c0.916,25.816) 0.751,25.651 ; v1@0.691,25.877 ccw(c0.916,25.816) 0.751,25.651 ; v1@0.691,25.877 ccw(c0.916,25.816) 0.751,25.651 ; v1@0.691,25.877 ccw(c0.916,25.816) 0.751,25.651 ; v1@0.691,25.877 ccw(c0.916,25.816) 0.751,25.651 ; v1@0.691,25.877 ccw(c0.916,25.816) 0.751,25.651 ; v1@0.691,25.877 ccw(c0.916,25.816) 0.751,25.651 ; v1@0.691,25.877 ccw(c0.916,25.816) 0.751,25.651 ; v1@0.691,25.877 ccw(c0.916,25.816) 0.751,25.651
FF_MICN: C40.2 U1.25 | length 13.1
  Top Layer w0.15: v1(-0.97,23.97) -0.78,24.16 C40.2@-0.78,24.59 ; v1@-1.044,24.071 ccw(c-1.423,24.59) C40.2@-0.78,24.59 ; v1@-1.044,24.071 ccw(c-1.423,24.59) C40.2@-0.78,24.59 ; v1@-1.044,24.071 ccw(c-1.423,24.59) C40.2@-0.78,24.59 ; v1@-1.044,24.071 ccw(c-1.423,24.59) C40.2@-0.78,24.59 ; v1@-1.044,24.071 ccw(c-1.423,24.59) C40.2@-0.78,24.59 ; v1@-1.044,24.071 ccw(c-1.423,24.59) C40.2@-0.78,24.59 ; v1@-1.044,24.071 ccw(c-1.423,24.59) C40.2@-0.78,24.59 ; v1@-1.044,24.071 ccw(c-1.423,24.59) C40.2@-0.78,24.59 ; v1@-1.044,24.071 ccw(c-1.423,24.59) C40.2@-0.78,24.59 ; v1@-0.955,23.95 ccw(c-1.207,24.295) -0.78,24.295 ; v1@-0.955,23.95 ccw(c-1.207,24.295) -0.78,24.295 ; v1@-0.955,23.95 ccw(c-1.207,24.295) -0.78,24.295 ; v1@-0.955,23.95 ccw(c-1.207,24.295) -0.78,24.295 ; v1@-0.955,23.95 ccw(c-1.207,24.295) -0.78,24.295 ; v1@-0.955,23.95 ccw(c-1.207,24.295) -0.78,24.295 ; v1@-0.955,23.95 ccw(c-1.207,24.295) -0.78,24.295 ; v1@-0.955,23.95 ccw(c-1.207,24.295) -0.78,24.295 ; v1@-0.955,23.95 ccw(c-1.207,24.295) -0.78,24.295
  Bottom Layer w0.15: v1(-0.97,23.97) -0.762,23.762 ; U1.25@-0.76,23.43 -0.762,23.432 -0.762,23.762 ; v1@-0.968,23.845 cw(c-0.963,23.561) -0.762,23.762 ; v1@-0.968,23.845 cw(c-0.963,23.561) -0.762,23.762 ; v1@-0.968,23.845 cw(c-0.963,23.561) -0.762,23.762 ; v1@-0.968,23.845 cw(c-0.963,23.561) -0.762,23.762 ; v1@-0.968,23.845 cw(c-0.963,23.561) -0.762,23.762 ; v1@-0.968,23.845 cw(c-0.963,23.561) -0.762,23.762 ; v1@-0.845,23.968 ccw(c-0.561,23.963) -0.762,23.762 ; v1@-0.845,23.968 ccw(c-0.561,23.963) -0.762,23.762 ; v1@-0.845,23.968 ccw(c-0.561,23.963) -0.762,23.762 ; v1@-0.845,23.968 ccw(c-0.561,23.963) -0.762,23.762 ; v1@-0.845,23.968 ccw(c-0.561,23.963) -0.762,23.762 ; v1@-0.845,23.968 ccw(c-0.561,23.963) -0.762,23.762
FF_MICP: C39.2 U1.26 | length 10.3
  Top Layer w0.15: C39.2@-1.35,24.59 -1.372,24.568 -1.372,23.803 -1.137,23.568 -0.668,23.568 v1@-0.36,23.876 ; -0.604,23.632 ccw(c-0.893,23.92) v1@-0.485,23.92 ; -0.604,23.632 ccw(c-0.893,23.92) v1@-0.485,23.92 ; -0.604,23.632 ccw(c-0.893,23.92) v1@-0.485,23.92 ; -0.604,23.632 ccw(c-0.893,23.92) v1@-0.485,23.92 ; -0.604,23.632 ccw(c-0.893,23.92) v1@-0.485,23.92 ; -0.604,23.632 ccw(c-0.893,23.92) v1@-0.485,23.92 ; -0.604,23.632 ccw(c-0.893,23.92) v1@-0.485,23.92 ; -0.604,23.632 ccw(c-0.893,23.92) v1@-0.485,23.92 ; -0.604,23.632 ccw(c-0.893,23.92) v1@-0.485,23.92 ; -0.498,23.738 cw(c-0.36,23.599) v1@-0.36,23.795 ; -0.498,23.738 cw(c-0.36,23.599) v1@-0.36,23.795 ; -0.498,23.738 cw(c-0.36,23.599) v1@-0.36,23.795 ; -0.498,23.738 cw(c-0.36,23.599) v1@-0.36,23.795 ; -0.498,23.738 cw(c-0.36,23.599) v1@-0.36,23.795 ; -0.498,23.738 cw(c-0.36,23.599) v1@-0.36,23.795 ; -0.498,23.738 cw(c-0.36,23.599) v1@-0.36,23.795 ; -0.498,23.738 cw(c-0.36,23.599) v1@-0.36,23.795 ; -0.498,23.738 cw(c-0.36,23.599) v1@-0.36,23.795
  Bottom Layer w0.15: v1@-0.38,23.92 -0.36,23.9 v1(-0.36,23.92)
  Bottom Layer w0.2: U1.26@-0.36,23.43 v1(-0.36,23.92) ; v1@-0.431,23.849 cw(c-0.601,23.679) U1.26@-0.36,23.679 ; v1@-0.431,23.849 cw(c-0.601,23.679) U1.26@-0.36,23.679 ; v1@-0.431,23.849 cw(c-0.601,23.679) U1.26@-0.36,23.679 ; v1@-0.431,23.849 cw(c-0.601,23.679) U1.26@-0.36,23.679 ; v1@-0.431,23.849 cw(c-0.601,23.679) U1.26@-0.36,23.679 ; v1@-0.431,23.849 cw(c-0.601,23.679) U1.26@-0.36,23.679 ; v1@-0.431,23.849 cw(c-0.601,23.679) U1.26@-0.36,23.679 ; v1@-0.431,23.849 cw(c-0.601,23.679) U1.26@-0.36,23.679 ; v1@-0.431,23.849 cw(c-0.601,23.679) U1.26@-0.36,23.679 ; U1.26@-0.36,23.679 cw(c-0.119,23.679) v1@-0.289,23.849 ; U1.26@-0.36,23.679 cw(c-0.119,23.679) v1@-0.289,23.849 ; U1.26@-0.36,23.679 cw(c-0.119,23.679) v1@-0.289,23.849 ; U1.26@-0.36,23.679 cw(c-0.119,23.679) v1@-0.289,23.849 ; U1.26@-0.36,23.679 cw(c-0.119,23.679) v1@-0.289,23.849 ; U1.26@-0.36,23.679 cw(c-0.119,23.679) v1@-0.289,23.849 ; U1.26@-0.36,23.679 cw(c-0.119,23.679) v1@-0.289,23.849 ; U1.26@-0.36,23.679 cw(c-0.119,23.679) v1@-0.289,23.849 ; U1.26@-0.36,23.679 cw(c-0.119,23.679) v1@-0.289,23.849